# Altium PCB PCB1.PcbDoc
Units mm, origin at the board's own origin, x right, y up, seen from the top; angles counter-clockwise.
Board outline 45.75 x 55 mm, 2 copper layers (Top Layer, Bottom Layer); 14 components, 20 nets, 76 pads, 6 vias.
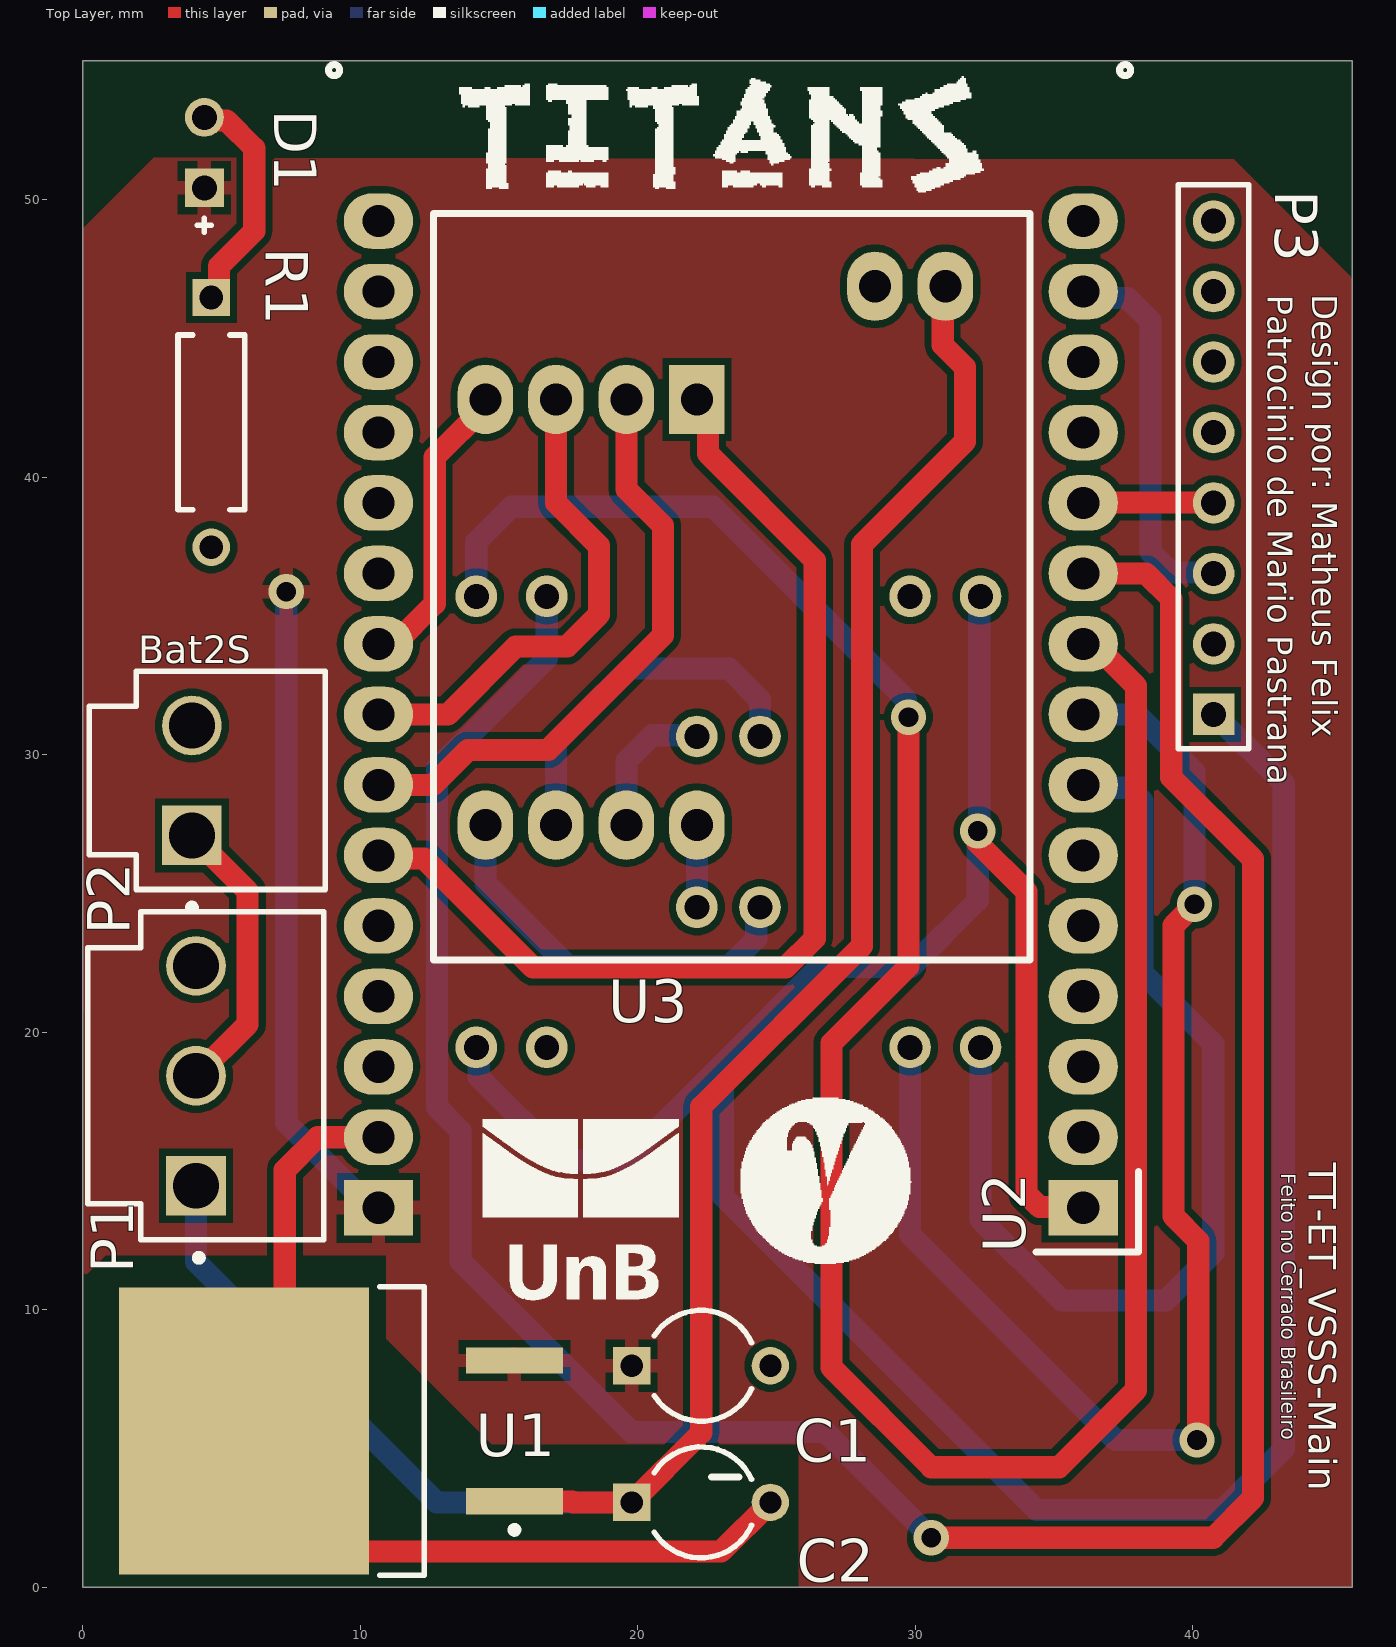
[diagram p0: Top Layer view]
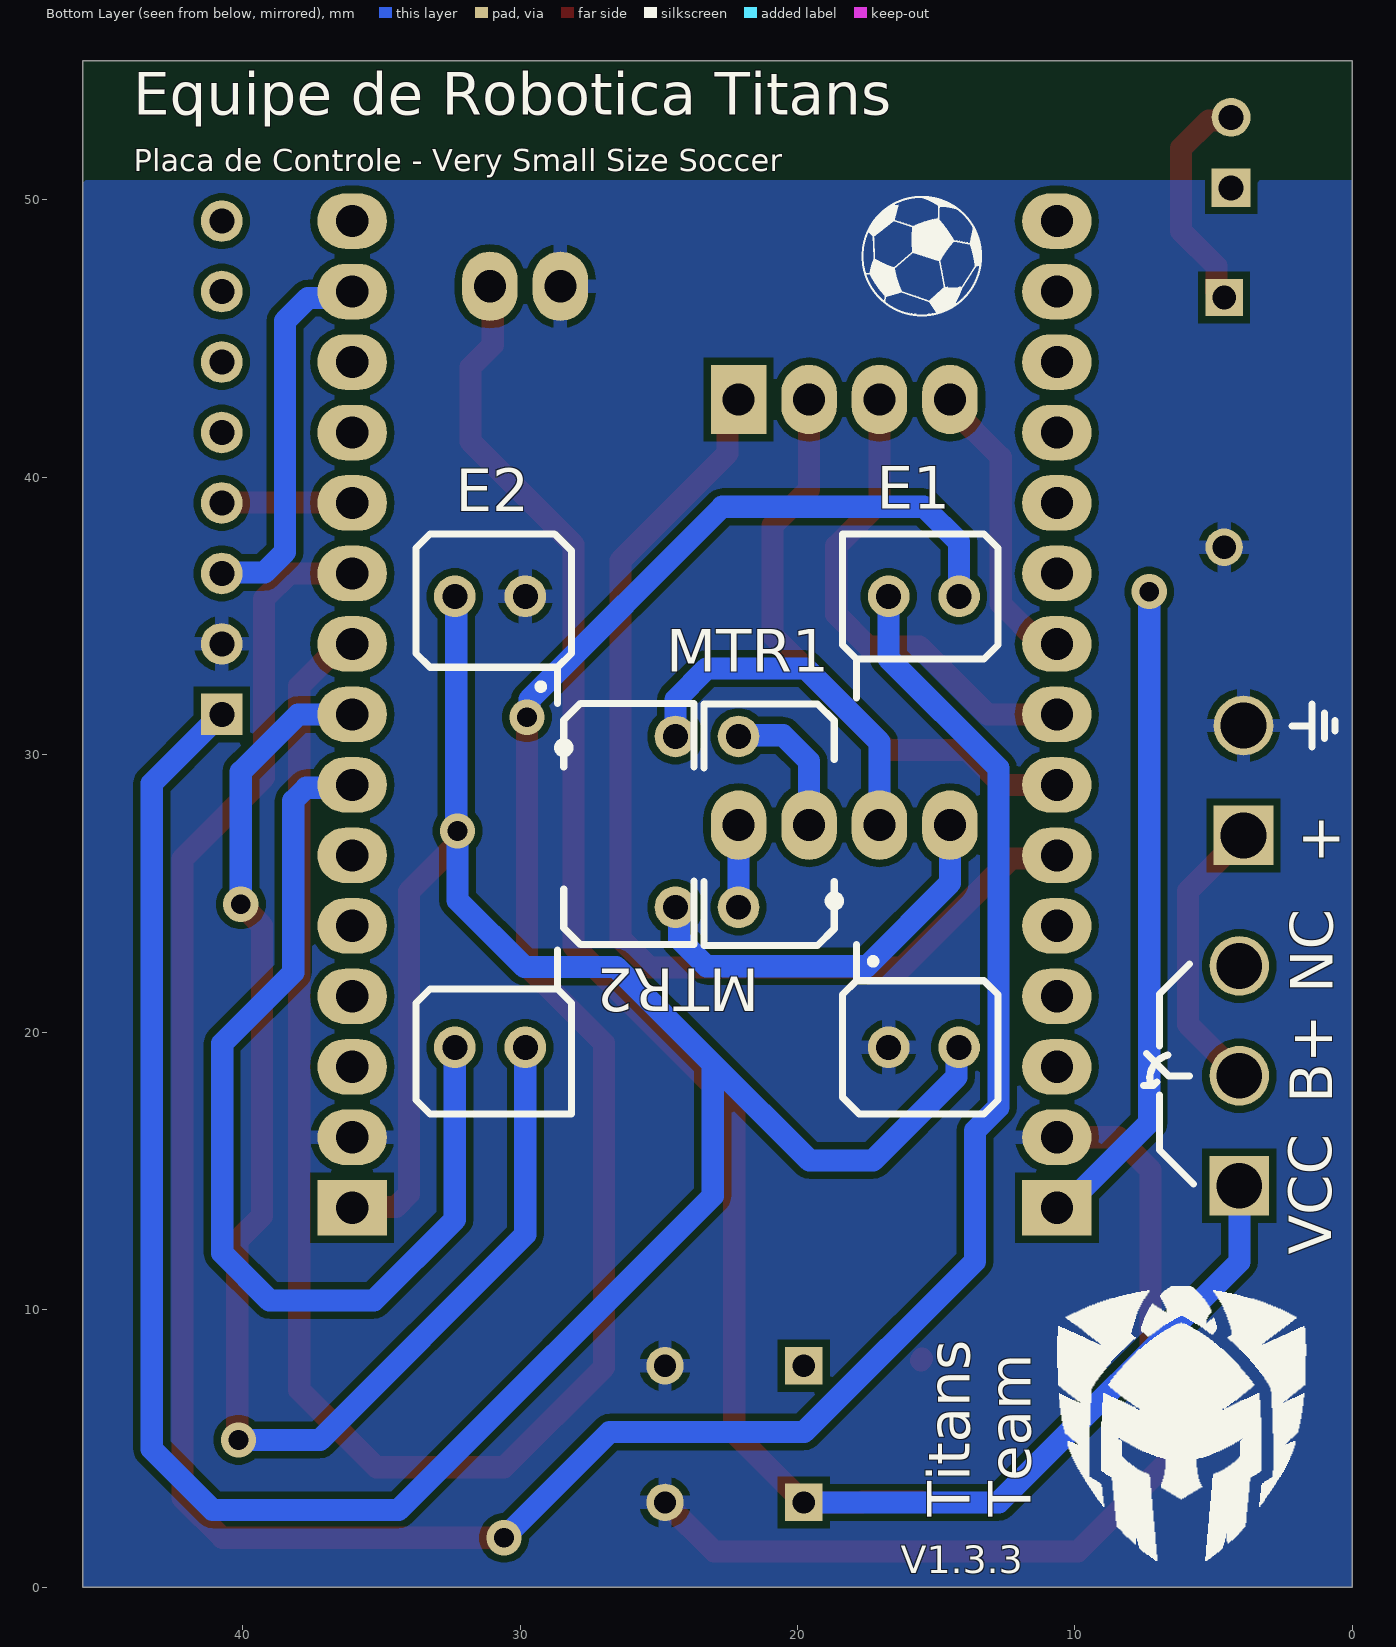
[diagram p1: Bottom Layer view, seen from below]

## Layer stack, top to bottom
Top Solder: solder mask 0.0102, Solder Resist, Dk 3.5
Top Layer: signal copper 0.0356
Dielectric 1: dielectric 0.32, FR-4, Dk 4.8
Bottom Layer: signal copper 0.0356
Bottom Solder: solder mask 0.0102, Solder Resist, Dk 3.5

## Board outline
0,0 0,55 45.752,55 45.752,0

## Design rules (kind name [scope] priority, off if disabled: settings)
Clearance Clearance_2 [InComponent('U3')] p1 off: gap=0 ignorepadtopadclearanceinfootprint=FALSE
Clearance [InComponent('U2')] p2 off: gap=0 ignorepadtopadclearanceinfootprint=FALSE
Clearance Clearance_1 [All] p3: gap=0.254 ignorepadtopadclearanceinfootprint=FALSE
ComponentClearance ComponentClearance_1 [InComponent('U2') vs InComponent('U3')] p1 off: gap=0 collisioncheckmode=3 verticalgap=2540 showdistances=FALSE donotcheckwithout3dbody=TRUE
ComponentClearance [All] p2: gap=0 collisioncheckmode=3 verticalgap=0.254 showdistances=FALSE
PolygonConnect [All] p1: connectstyle=Relief reliefconductorwidth=0.5 reliefentries=4 polygonreliefangle="90 Angle" airgapwidth=0.254
RoutingVias [All] p1: holewidth=0.711 width=1.27 viastyle="Through Hole" minholewidth=0.711 minwidth=1.27 maxholewidth=0.711 maxwidth=1.27
SilkToSilkClearance SilkToSilkClearance_1 [All] p1: silktosilkclearance=0
SilkToSilkClearance [All] p2 off: silktosilkclearance=0.254
SilkToSolderMaskClearance [IsPad] p1: minsilkscreentomaskgap=0 clearancetoexposedcopper=TRUE
SilkToSolderMaskClearance SilkToSolderMaskClearance_2 [HasFootprint('MODULE_ESP32_DEVKIT_V1')] p2 off: minsilkscreentomaskgap=0 clearancetoexposedcopper=TRUE
SilkToSolderMaskClearance SilkToSolderMaskClearance_1 [IsPad] p3 off: minsilkscreentomaskgap=0.254 clearancetoexposedcopper=TRUE
SolderMaskExpansion [All] p1: expansion=0.102 istentingtop=FALSE
SupplyNets "Schematic Supply Nets_3" [InNet('GND')] p1: voltage=0.000
SupplyNets "Schematic Supply Nets_2" [InNet('7V4')] p2: voltage=0.000
SupplyNets "Schematic Supply Nets_1" [InNet('5V')] p3: voltage=0.000
SupplyNets "Schematic Supply Nets" [InNet('3V3')] p4: voltage=0.000
Width [All] p1: maxlimit=1 minlimit=0.5 preferedwidth=0.8 minimp=50.000000 maximp=50.000000 favimp=50.000000
27 further rules are at their usual default settings.

## Components (designator, comment, footprint, x,y, rotation, side; value= is the part's Value field where it differs from the comment)
C1 "Cap2" CAPR5-4X5 22.275,7.975 r0 top value=100nF
C2 "Cap2" CAPR5-4X5 22.275,3.05 r0 top value=330nF
D1 "On LED" LTST-LTL-1CHG-2 4.375,51.7 r90 top locked
E1 "PololuEncoder" PololuEncoder#1 14.175,19.45 r90 bottom
E2 "PololuEncoder" PololuEncoder#2 32.35,35.55 r270 bottom
MTR1 "N20-Motor" N20-Motor_Encaixe#1 21.075,24.625 r90 bottom
MTR2 "N20-Motor" N20-Motor_Encaixe#2 26.025,30.35 r270 bottom
P1 "On/Off Switch" JST-B3P-VH(LF)(SN)-3_V 5.325,18.425 r90 top locked
P2 "Battery 7V6" JST-B2P-VH(LF)(SN)_V 5.325,29.07 r90 top locked
P3 "MPU-6050" HDR1X8 40.75,31.485 r90 top
R1 "MFR-25FBF52-4K75" RESA60-630X240 4.625,41.975 r270 top value=180R
U1 "L7805" TO-263_L 9.3,5.625 r180 top
U2 "ESP32-DEVKIT-V1" ESP32DEVKIT 10.55,13.97 r0 top locked
U3 "MX1616H-Module" MX1616H-Module 22.125,42.7 r270 top

## Footprints (in the part's own frame and the unit in brackets; to place one, negate y for a bottom-side part, rotate by r counter-clockwise, add the part's x,y. Pads: shape width x height; smd on the part's side, far side on the other; paste and mask are expansions set on the pad)
CAPR5-4X5 [mm] "Capacitor; 2 Leads"
  rect 1.35x1.35 hole 0.8: 1(-2.5,0)
  round 1.35 hole 0.8: 2(2.5,0)
  silkscreen extent -1.69,-2 1.82,2
ESP32DEVKIT [mm]
  rect 2.5x2 hole 1.16: 1(25.5,-0.3) 30(0.1,-0.3)
  oval 2.5x2 hole 1.16: 2(25.5,2.24) 3(25.5,4.78) 4(25.5,7.32) 5(25.5,9.86) 6(25.5,12.4) 7(25.5,14.94) 8(25.5,17.48) 9(25.5,20.02) 10(25.5,22.56) 11(25.5,25.1) 12(25.5,27.64) 13(25.5,30.18) 14(25.5,32.72) 15(25.5,35.26) 16(0.1,35.26) 17(0.1,32.72) 18(0.1,30.18) 19(0.1,27.64) 20(0.1,25.1) 21(0.1,22.56) 22(0.1,20.02) 23(0.1,17.48) 24(0.1,14.94) 25(0.1,12.4) 26(0.1,9.86) 27(0.1,7.32) 28(0.1,4.78) 29(0.1,2.24)
  silkscreen extent -1.7,-10 27.5,40.9
HDR1X8 [mm] "Connector; Header; 8 Position"
  rect 1.5x1.5 hole 0.9: 1(-0.035,0)
  round 1.5 hole 0.9: 2(2.505,0) 3(5.045,0) 4(7.585,0) 5(10.125,0) 6(12.665,0) 7(15.205,0) 8(17.745,0)
  silkscreen extent -1.27,-1.27 19.05,1.27
JST-B2P-VH(LF)(SN)_V [mm] "THD, 2-Leads, Body 8.5x7.86mm, Pitch 3.96mm"
  rect 2.15x2.15 hole 1.65: 1(-1.98,1.4)
  round 2.15 hole 1.65: 2(1.98,1.4)
  silkscreen extent -4.7,-3.4 3.93,5.1, body extent -3.93,-3.2 3.93,5.3, height 10.9
JST-B3P-VH(LF)(SN)-3_V [mm] "Connector, 3-Leads, Body 8.5x11.82mm, Pitch 3.96mm"
  rect 2.15x2.15 hole 1.65: 1(-3.96,1.25)
  round 2.15 hole 1.65: 2(0,1.25) 3(3.96,1.25)
  silkscreen extent -6.68,-3.35 5.91,5.15, body extent -5.91,-3.35 5.91,5.15, height 10.9
LTST-LTL-1CHG-2 [mm] "TH, 2-Leads, Dia 3.8mm"
  rect 1.4x1.4 hole 0.9: 1(-1.27,0)
  round 1.4 hole 0.9: 2(1.27,0)
  silkscreen extent -2.87,-0.25 -2.37,0.25, body extent -1.9,-1.9 1.9,1.9, height 6.5
MX1616H-Module [mm]
  rect 2.5x2 hole 1.16: 1(-0.1,0)
  oval 2.5x2 hole 1.16: 2(-0.1,-2.54) 3(-0.1,-5.08) 4(-0.1,-7.62) 5(15.24,-7.62) 6(15.24,-5.08) 7(15.24,-2.54) 8(15.24,0) 9(-4.18,6.42) 10(-4.18,8.96)
  silkscreen extent -6.8,-9.5 20.1,12
N20-Motor_Encaixe#1 [mm]
  round 1.5 hole 0.9: 1(-0.125,1.05) 2(6.03,1.05)
  silkscreen extent -1.5,-2.62 7.2,2.3
N20-Motor_Encaixe#2 [mm]
  round 1.5 hole 0.9: 1(-0.305,1.625) 2(5.85,1.625)
  silkscreen extent -1.5,-2.62 7.2,2.3
PololuEncoder#1 [mm]
  round 1.5 hole 0.9: 1(0,2.54) 2(0,0) 3(16.256,2.54) 4(16.256,0)
  silkscreen extent -2.4,-1.4 18.5,4.2
PololuEncoder#2 [mm]
  round 1.5 hole 0.9: 1(-0.156,2.54) 2(-0.156,0) 3(16.1,2.54) 4(16.1,0)
  silkscreen extent -2.4,-1.4 18.5,4.2
RESA60-630X240 [mm] "Axial Resistor, 2-Leads, Dia 2.4mm, Body Length 6.3mm"
  rect 1.35x1.35 hole 0.85: 1(-4.5,0)
  round 1.35 hole 0.85: 2(4.5,0)
  silkscreen extent -3.15,-1.2 3.15,1.2, body extent -4.77,-1.19 4.77,1.2, height 2.4
TO-263_L [mm] "D2-PAK, 4-Leads, Body 9.2x10.2mm, Pitch 2.54mm, Lead Span 15.4mm, IPC High Density"
  rect 3.5x0.95 smd: 1(-6.25,2.54) 3(-6.25,-2.54)
  rect 9x10.35 smd: 4(3.5,0)
  silkscreen extent -6.38,-5.2 -1.4,5.2, body extent -3,-5.2 6.35,5.2, height 4.6

## Part data
C1 C2: library part CMP-001-00090-1, "Capacitor", Case/Package="Capacitor; 2 Leads", Component Type=Standard, Design Item ID=Cap2, PackageReference=CAPR5-4X5, Pins=2, Published=23-Sep-2002, Publisher="Altium Limited", Source="Miscellaneous Devices.SchLib"
D1: library part CMP-007-00019-2, "LED Uni-Color Green, 100 mW, 30 mA, -55 to 100 degC, 2-Pin THD, RoHS, Bulk", Case/Package=Radial, Colour=Green, Forward Current=30mA, Forward Voltage=2.6V, Manufacturer=Lite-On, Max Operating Temperature=100°C, Min Operating Temperature=-55°C, Package Description="2-Pin Through Hole Device, Dia 3.8 mm", Package Quantity=1000, Package Reference=LTL-1CHG, Power=100mW, Datasheet URL=http://datasheet.octopart.com/LTL-1CHG-Lite-On-datasheet-143841.pdf, Datasheet Version=Mar-00, Illumination Colour=Green, Lens Style=Dome, Luminous Intensity=12.6mcd, Manufacturer URL=http://www.us.liteon.com/, Mounting Technology=TH, Nominal Vf=2.1V, Packaging=Bulk, Pins=2, RoHS Compliant=True, Viewing Angle=60degrees
E1 E2: "Pololu Optical Quadrature Encoder"
P1: library part CMP-002-00026-2, "Male Header, Pitch 3.96 mm, 1 x 3 Position, Height 10.9 mm, Tail Length 3.7 mm, -25 to 85 degC, RoHS, Bulk", Case/Package=B3P-VH(LF)(SN), Manufacturer=JST, Max Operating Temperature=85°C, Min Operating Temperature=-25°C, Package Description="Male Header, Pitch 3.96 mm, 1 x 3 Position, Height 10.9 mm, Tail Length 3.7 mm", Connector Type=Header, Datasheet URL=http://www.jst-mfg.com/product/pdf/eng/eVH.pdf, Datasheet Version=May-16, Gender=Male, Manufacturer URL=http://www.jst.com/home2.html, Mounting Technology=TH, Package Reference=B3P-VH(LF)(SN), RoHS Compliant=Unknown
P2: library part CMP-002-00025-2, "Male Header, Pitch 3.96 mm, 1 x 2 Position, Height 10.9 mm, Tail Length 3.7 mm, -25 to 85 degC, RoHS, Bulk", Case/Package=B2P-VH(LF)(SN), Manufacturer=JST, Max Operating Temperature=85°C, Min Operating Temperature=-25°C, Package Description="Male Header, Pitch 3.96 mm, 1 x 2 Position, Height 10.9 mm, Tail Length 3.7 mm", Connector Type=Header, Datasheet URL=http://www.jst-mfg.com/product/pdf/eng/eVH.pdf, Datasheet Version=May-16, Gender=Male, Manufacturer URL=http://www.jst.com/home2.html, Mounting Technology=TH, Package Reference=B2P-VH(LF)(SN), RoHS Compliant=Unknown
P3: library part "Header 8", "Header, 8-Pin", LatestRevisionDate=17-Jul-2002, LatestRevisionNote="Re-released for DXP Platform.", Publisher="Altium Limited"
R1: library part CMP-009-00059-4, "Axial Resistor, 4.75 KOhm, +/- 1%, 0.25 W, -55 to 155 degC, 2-Pin THD, RoHS, Bulk", Case/Package=Axial, Manufacturer=Yageo, Max Operating Temperature=155°C, Min Operating Temperature=-55°C, Package Description="2-Pin Axial Lead, Dia 2.4 mm, Body Length 6.3 mm", Package Quantity=200, Package Reference=MFR-25, Power=250mW, Tolerance=1%, Voltage Rating=250V, Composition=MetalFilm, Datasheet URL=http://www.yageo.com/documents/recent/Yageo%20LR_MFR_2013.pdf, Datasheet Version=Apr-13, Manufacturer URL=http://www.yageo.com/, Mounting Technology=TH, Packaging=Bulk, RoHS Compliant=True
U1: library part CMP-0244-00213-1, "Positive Voltage Regulator, 3-Pin D2PAK, Tape and Reel", ComponentLink1Description="Manufacturer URL", ComponentLink1URL=http://www.st.com, ComponentLink2Description=Datasheet, ComponentLink2URL=http://www.st.com/internet/com/TECHNICAL_RESOURCES/TECHNICAL_LITERATURE/DATASHEET/CD00000444.pdf, DatasheetVersion=16/11/2011, PackageDescription="3-Pin Transistor Outline Package 2.54 mm Pitch, 15.4 mm Lead Span (D2PAK)", PackageReference=TO-263, PackageVersion=2011
U2: "Dual core, Wi-Fi: 2.4 GHz up to 150 Mbits/s,BLE (Bluetooth Low Energy) and legacy Bluetooth, 32 bits, Up to 240 MHz", Package=None, Availability="Not in stock", Check_prices=https://www.snapeda.com/parts/ESP32-DEVKIT-V1/Do+it/view-part/?ref=eda, MF="Do it", MP=ESP32-DEVKIT-V1, Price=None, SnapEDA_Link=https://www.snapeda.com/parts/ESP32-DEVKIT-V1/Do+it/view-part/?ref=snap
U3: "Full Bridge Based Peripheral Driver", Manufacturer=STMicroelectronics, Manufacturer Part Number=L298N, Max Supply Voltage=7V, Min Supply Voltage=4.5V, Nominal Supply Voltage=5V, Output Current Flow Direction="SOURCE AND SINK", Package Shape=Rectangular, Package Style="FLANGE MOUNTMeter", Supplier Part Number=MX1616H, Supply Voltage1-Max=46V, Supply Voltage1-Min=4.8V, Supply Voltage1-Nom=42V, Built-in Protections="Over Current", Category="Motor Drivers", Channels=2, ComponentLink1Description=https://datasheet.ciiva.com:443/pdfs/VipMasterIC/IC/SGST/SGSTS36572/SGSTS36572-1.pdf?src-supplier=IHS+Markit, ComponentLink1URL=https://datasheet.ciiva.com:443/pdfs/VipMasterIC/IC/SGST/SGSTS36572/SGSTS36572-1.pdf?src-supplier=IHS+Markit, ComponentLink2Description=https://datasheet.ciiva.com/14150/ofl298n-647108-dat-en-14150301.pdf?src-supplier=Distrelec, ComponentLink2URL=https://datasheet.ciiva.com/14150/ofl298n-647108-dat-en-14150301.pdf?src-supplier=Distrelec, ComponentLink3Description=https://datasheet.ciiva.com/19456/245403-19456698.pdf?src-supplier=Jameco, ComponentLink3URL=https://datasheet.ciiva.com/19456/245403-19456698.pdf?src-supplier=Jameco, ComponentLink4Description=https://datasheet.ciiva.com/15109/getdatasheetpartid-50682-15109332.pdf?src-supplier=Verical, ComponentLink4URL=https://datasheet.ciiva.com/15109/getdatasheetpartid-50682-15109332.pdf?src-supplier=Verical, ComponentLink5Description=https://datasheet.ciiva.com/25626/0900766b80060c26-25626619.pdf?src-supplier=Rs, ComponentLink5URL=https://datasheet.ciiva.com/25626/0900766b80060c26-25626619.pdf?src-supplier=Rs, ComponentLink6Description=https://datasheet.ciiva.com/29306/156128-da-01-en-dual-bridge-driv-l298n-29306997.pdf?src-supplier=Conrad, ComponentLink6URL=https://datasheet.ciiva.com/29306/156128-da-01-en-dual-bridge-driv-l298n-29306997.pdf?src-supplier=Conrad, ComponentLink7Description=https://datasheet.ciiva.com/1501/1693054-1501547.pdf?src-supplier=Element14, ComponentLink7URL=https://datasheet.ciiva.com/1501/1693054-1501547.pdf?src-supplier=Element14, ComponentLink8Description=https://datasheet.ciiva.com/1608/1693054-1608165.pdf?src-supplier=Newark, ComponentLink8URL=https://datasheet.ciiva.com/1608/1693054-1608165.pdf?src-supplier=Newark, ComponentLink9Description=https://datasheet.ciiva.com/1500/1693054-1500714.pdf?src-supplier=Element14, ComponentLink9URL=https://datasheet.ciiva.com/1500/1693054-1500714.pdf?src-supplier=Element14, ComponentLink10Description=https://datasheet.ciiva.com/1955/cd00000240-1955436.pdf?src-supplier=Digi-Key, ComponentLink10URL=https://datasheet.ciiva.com/1955/cd00000240-1955436.pdf?src-supplier=Digi-Key, ComponentLink11Description=https://datasheet.ciiva.com/4895/cd00000240-4895919.pdf?src-supplier=Mouser, ComponentLink11URL=https://datasheet.ciiva.com/4895/cd00000240-4895919.pdf?src-supplier=Mouser, Input Characteristics=STANDARD, Interface IC Type="FULL BRIDGE BASED PERIPHERAL DRIVER", JESD-609 Code=e3, Output Characteristics=TOTEM-POLE, Output Polarity=True, Pins=15, Pricing="1=11,87, 10=10,91, 25=10,14, 50=10,14, 100=8,76, 250=8,44, 500=7,89, 1000=7,89, 10000=7,89 (USD)", Qualification Status="Not Qualified", Reach SVHC Compliant=No, RoHS=Yes, RoHS Compliant=Yes, Stock=19, Supplier=Mouser, Surface Mount=No, Terminal Finish=Tin, Terminal Form="Through Hole", Terminal Position=ZIG-ZAG

## Via types
v1: diameter 1.27, hole 0.711, Top Layer to Bottom Layer, 6 vias

## Nets (pads, with @x,y where several pads share a name; then routed paths per layer and width w, separated by ;. In a path a pad name is that pad's centre, name@x,y a point inside that pad or via, vN(x,y) a via of type N, cw(c..) or ccw(c..) an arc to the next point about the centre after c; other vN are vias at no path point)
3V3: E1.2 E2.2 P3.1 U2.1 | length 110.1
  Top Layer w0.8: v1(32.25,27.25) 32.25,26.819 34,25.069 34,14.175 34.475,13.7 36.02,13.7 U2.1 U2.1@35.45,14.27
  Bottom Layer w0.8: E1.2 14.264,19.361 14.264,18.382 17.277,15.37 19.57,15.37 23.055,18.855 ; E2.2@32.35,35.55 32.3,35.5 32.3,27.3 v1(32.25,27.25) 32.25,24.75 29.841,22.341 26.541,22.341 23.055,18.855 ; P3.1@40.75,31.485 43.275,28.96 43.275,4.975 41.075,2.775 34.375,2.775 23.055,14.095 23.055,18.855
5V: C1.1 D1.1 U1.3 U2.30 | length 23.8
  Top Layer w0.8: U1.3@15.509,8.24 U1.3
  Bottom Layer w0.8: v1(7.325,35.875) 7.325,16.745 10.4,13.67 U2.30
7V4: C2.1 P1.1 U1.1 U3.10 | length 75.8
  Top Layer w0.8: U1.1 17.634,3.085 17.669,3.05 C2.1 22.283,5.558 22.283,17.308 28.075,23.1 28.075,37.575 31.785,41.285 31.785,43.961 30.985,44.761 U3.10@30.985,47.28
  Bottom Layer w0.8: P1.1 4.075,11.725 12.75,3.05 C2.1
GND: C1.2 C2.2 E1.1 E2.1 P2.2 P3.2 R1.2 U1.4 U2.2 U2.29 U3.9 | length 35.5
  Top Layer w0.8: U2.29 8.46,16.21 7.275,15.025 7.275,7.1 U1.4 5.8,5.375 9.9,1.275 23,1.275 C2.2
NetD1_2: D1.2 R1.1 | length 8.4
  Top Layer w0.8: D1.2 4.49,52.855 5.174,52.855 6.175,51.854 6.175,48.875 4.9,47.6 4.9,46.679 R1.1@4.625,46.404
NetE1_3: E1.3 U2.10 | length 96.4
  Top Layer w0.8: v1(30.575,1.775) 40.735,1.775 42.171,3.211 42.171,26.234 39.224,29.18 39.224,35.616 38.31,36.53 U2.10
  Bottom Layer w0.8: E1.3 16.715,33.468 12.758,29.51 12.758,17.294 13.608,16.444 13.608,11.743 19.768,5.583 26.767,5.583 v1(30.575,1.775)
NetE1_4: E1.4 U2.9 | length 87.6
  Top Layer w0.8: v1(29.75,31.35) 29.75,22.375 26.975,19.6 26.975,7.915 30.575,4.315 35.174,4.315 37.954,7.096 37.954,32.475 36.439,33.99 U2.9
  Bottom Layer w0.8: E1.4 14.175,37.659 15.45,38.934 22.711,38.934 29.66,31.984 29.66,31.44 v1(29.75,31.35)
NetE2_3: E2.3 U2.8 | length 49.7
  Top Layer w0.8: v1(40.063,24.608) 39.301,23.846 39.301,13.369 40.195,12.475 40.195,5.345 v1(40.15,5.3)
  Bottom Layer w0.8: E2.3@29.81,19.294 29.81,12.7 37.21,5.3 v1(40.15,5.3) ; U2.8 37.996,31.45 40.063,29.383 v1(40.063,24.608)
NetE2_4: E2.4 U2.7 | length 36.1
  Bottom Layer w0.8: E2.4@32.35,19.294 32.35,13.25 35.275,10.325 39.025,10.325 40.735,12.035 40.735,19.592 38.175,22.152 38.175,28.336 37.706,28.805 36.155,28.805 U2.7
NetMTR1_1: MTR1.1 U3.8 | length 3
  Bottom Layer w0.8: MTR1.1 U3.8
NetMTR1_2: MTR1.2 U3.7 | length 5.9
  Bottom Layer w0.8: U3.7@19.585,27.926 U3.7 19.585,29.76 20.525,30.7 22.08,30.7 MTR1.2 MTR1.2@22.125,30.466
NetMTR2_1: MTR2.1 U3.6 | length 13.2
  Bottom Layer w0.8: U3.6 17.045,30.45 19.695,33.1 23.275,33.1 24.4,31.975 MTR2.1
NetMTR2_2: MTR2.2 U3.5 | length 14.7
  Bottom Layer w0.8: U3.5 14.505,25.37 17.5,22.375 23.275,22.375 24.266,23.366 24.266,24.366 MTR2.2
NetP1_2: P1.2 P2.1 | length 10.3
  Top Layer w0.8: P2.1 5.925,25.09 5.925,20.275 P1.2
NetP3_3: P3.3 U2.14 | length 13.8
  Bottom Layer w0.8: U2.14 36.28,46.46 37.64,46.46 38.475,45.625 38.475,37.3 39.21,36.565 P3.3@40.75,36.565
NetP3_4: P3.4 U2.11 | length 4.7
  Top Layer w0.8: U2.11 36.068,39.087 40.732,39.087 P3.4@40.75,39.105
NetU2_22: U2.22 U3.4 | length 11
  Top Layer w0.8: U2.22@10.838,33.802 U2.22 11.225,33.99 12.675,35.44 12.675,40.72 14.505,42.55 U3.4
NetU2_23: U2.23 U3.3 | length 18.1
  Top Layer w0.8: U2.23@10.4,31.45 U2.23 13.15,31.45 15.6,33.9 17.45,33.9 18.6,35.05 18.6,37.525 17.045,39.08 U3.3
NetU2_24: U2.24 U3.2 | length 21.5
  Top Layer w0.8: U2.24 12.615,28.91 13.875,30.171 16.766,30.171 20.9,34.305 20.9,38.25 19.585,39.565 U3.2
NetU2_25: U2.25 U3.1 | length 39
  Top Layer w0.8: U2.25 10.766,26.254 12.296,26.254 16.225,22.325 25.325,22.325 26.375,23.375 26.375,37 22.524,40.851 22.524,42.401 U3.1
pads on no net: P1.3 P3.5 P3.6 P3.7 P3.8 U2.3 U2.4 U2.5 U2.6 U2.12 U2.13 U2.15 U2.16 U2.17 U2.18 U2.19 U2.20 U2.21 U2.26 U2.27 U2.28

## Polygon pours and split planes (outlines as drawn)
5V on Top Layer "NONET_L02_P-001" (solid, pour order 1): 0.025,11.15 0.825,11.95 10.925,11.95 10.925,8.95 14.725,5.15 25.8,5.15 25.8,0 45.75,0 45.75,47.175 41.475,51.45 2.575,51.525 0,48.95
GND on Bottom Layer "NONET_L02_P-001" (solid, pour order 0): 0,0 45.75,0 45.75,50.702 0,50.698

## Silkscreen, mask and mechanical layers (free items; w line width, h text height)
Top Overlay:
  drawing of 16 lines, arcs and shapes, not listed
  text "Design por: Matheus Felix" at 44.304,46.596 h0.9 r270
  text "Patrocinio de Mario Pastrana" at 42.704,46.571 h0.9 r270
  text "Bat2S" at 2,33.3 h1
  text "TT-ET_VSSS-Main" at 44.171,15.296 h1 r270
  text "Feito no Cerrado Brasileiro" at 43.179,14.921 h0.52 r270
Bottom Overlay:
  drawing of 20 lines, arcs and shapes, not listed
  text "Equipe de Robotica Titans" at 43.946,53.062 h1.52
  text "Placa de Controle - Very Small Size Soccer" at 43.921,51.021 h0.8
  text "+" at 1.996,26.275 h1.52
  text "NC" at 0.704,21.404 h1.52 r270
  text "B+" at 0.729,17.429 h1.52 r270
  text "VCC" at 0.754,11.979 h1.52 r270
  text "Team" at 11.6,2.525 h1.52 r270
  text "Titans" at 13.8,2.525 h1.52 r270
  text "V1.3.3" at 16.271,0.504 h1
Mechanical 1:
  region: 14.437,9.787 14.437,9.806 14.455,9.806 14.455,9.787
  region: 21.409,56.017 21.409,56.082 21.475,56.082 21.475,56.017
  region: 4.53,1.579 4.53,1.543 4.495,1.543 4.495,1.579
  region: 10.292,5.29 10.292,5.255 10.257,5.255 10.257,5.29
  region: 5.807,0.31 5.807,0.267 5.764,0.267 5.764,0.31
  region: 12.845,4.843 12.845,4.8 12.802,4.8 12.802,4.843